# EAGLE board fascias_v2.0.1.zig1 (EAGLE 9.6.2)

Size 247.79 x 231.2 mm. Coordinates in mm from the lower left corner, seen from the top.
Outline: 105,124.2 105,117.2
Outline: 94,124.2 94,117.2
Outline: 116,124.2 116,117.2
Outline: 148,124.2 148,116.7
Outline: 131,124.2 131,116.7
Outline: 160,124.2 160,116.7
Outline: 162.1,92.3 arc-90 165.7,88.8 165.7,51.6 arc-90 162.1,48 77.9,48 arc-90 74.3,51.5 74.3,88.7 arc-90 77.8,92.3 162.1,92.3
Outline: 118.5,125.2 129.5,125.2 129.5,129.2 118.5,129.2 118.5,125.2
Outline: 162.1,140.3 arc-90 165.7,136.8 165.7,99.6 arc-90 162.1,96 77.9,96 arc-90 74.3,99.5 74.3,136.7 arc-90 77.8,140.3 162.1,140.3
Outline: 94,125.2 116,125.2 116,132.95 94,132.95 94,125.2
Outline: 131,125.2 160,125.2 160,132.95 148,132.95 148,137.2 131,137.2 131,125.2
Outline: 119.5,101.2 133.5,101.2 133.5,105.2 119.5,105.2 119.5,101.2
Outline: 157,231.2 83,231.2 83,146.2 157,146.2 157,231.2
Outline: 173.79,146.2 247.79,146.2 247.79,231.2 173.79,231.2 173.79,146.2
Outline: 86,73.2 arc-90 87,74.2 140,74.2 arc-90 141,73.2 141,58.2 arc-90 140,57.2 87,57.2 arc-90 86,58.2 86,73.2
Outline: 162.6,44.3 arc-90 166.2,40.8 166.2,3.6 arc-90 162.6,0 78.4,0 arc-90 74.8,3.5 74.8,40.7 arc-90 78.3,44.3 162.6,44.3
Outline: 74,231.2 0,231.2 0,146.2 74,146.2 74,231.2
Outline: circle at 87,79.7 radius 3.04
Outline: circle at 85,131.7 radius 3.5
Outline: circle at 100,79.7 radius 3.04
Outline: circle at 113,79.7 radius 3.04
Outline: circle at 127,79.7 radius 3.04
Outline: circle at 140,79.7 radius 3.04
Outline: circle at 153,79.7 radius 3.04
Outline: circle at 123.5,214.7 radius 3
Outline: circle at 77.86,136.8 radius 1.7
Outline: circle at 162.18,136.77 radius 1.7
Outline: circle at 162.2,99.56 radius 1.7
Outline: circle at 77.86,99.56 radius 1.7
Outline: circle at 77.87,88.77 radius 1.7
Outline: circle at 77.86,51.55 radius 1.7
Outline: circle at 162.19,51.56 radius 1.7
Outline: circle at 162.19,88.77 radius 1.7
Outline: circle at 87.5,31.7 radius 3.04
Outline: circle at 100.5,31.7 radius 3.04
Outline: circle at 113.5,31.7 radius 3.04
Outline: circle at 127.5,31.7 radius 3.04
Copper layers (1*16): Top 8mil / dielectric 8mil / Bottom 8mil
Design rules "default *": minimum track width 8mil, minimum drill 0.5mm, track to track 8mil, track to pad 8mil, pad to pad 8mil, via to via 8mil, smd to smd 8mil, copper to edge 10mil, drill to drill 8mil, minimum pad ring 8mil, minimum via ring 8mil, stop-mask expansion 0.075mm, vias tented up to drill 0.6mm, thermal gap 8mil
Net classes: 0 default: width 0.203 mm, drill 0.6 mm, clearance 0.203 mm; 1 power: width 0.305 mm, drill 0.6 mm, clearance 0.254 mm; 2 gnd: width 0.254 mm, drill 0.6 mm, clearance 0.254 mm; 3 5V0_PI: width 0.406 mm, drill 0.4 mm; 4 3V3_PI: width 0.254 mm, drill 0.4 mm

## Placement (x,y rotation side)
LOGO3  OSHW_LOGO_10MILX0200-NT  [OSHW_10X200_NOTEXT]  150.16,66.13 0 top

## Library data of the parts
LOGO3 = ohw-logo

## Text on the board
Dimension: Temperature | GND | 3V3 | GND | 3V3 | GND | 3V3 | emonVS | 433 / Mhz | USB | voltage / sensor | SD CARD | emon | 333 mV CT Sensors | CT 1 | CT 2 | CT 3 | CT 4 | CT 5 | CT 6 | OPEN / HARDWARE | Open | .org | CT 1 | CT 2 | CT 3 | CT 4 | CT 5 | CT 6 | CT 7 | CT 8 | CT 9 | CT 10 | CT 11 | CT 12 | Open | .org
_tsilk: Designed in | North Wales | Made in UK
_bsilk: 165mm ant | 433Mhz | 165mm ant | 165mm ant | 433Mhz | 433Mhz | 868Mhz | 82mm ant | 82mm ant | 82mm ant | 868Mhz | 868Mhz | 78mm ant | 915Mhz | 78mm ant | 915Mhz | 78mm ant | 915Mhz | 165mm ant | 433Mhz | 82mm ant | 868Mhz | 78mm ant | 915Mhz
OEM_BLUE: DAT | DAT | ADC | Pi2 | EnergyMonitor | EnergyMonitor
OEM3: Menu | emonPi2 | emonPi2 | OpenEnergyMonitor.org | OpenEnergyMonitor.org